# Altium PCB PCB2.PcbDoc
Units mm, origin at the board's own origin, x right, y up, seen from the top; angles counter-clockwise.
Board outline 98.3 x 90.93 mm, 2 copper layers (Top Layer, Bottom Layer); 17 components, 62 nets, 211 pads, 0 vias.
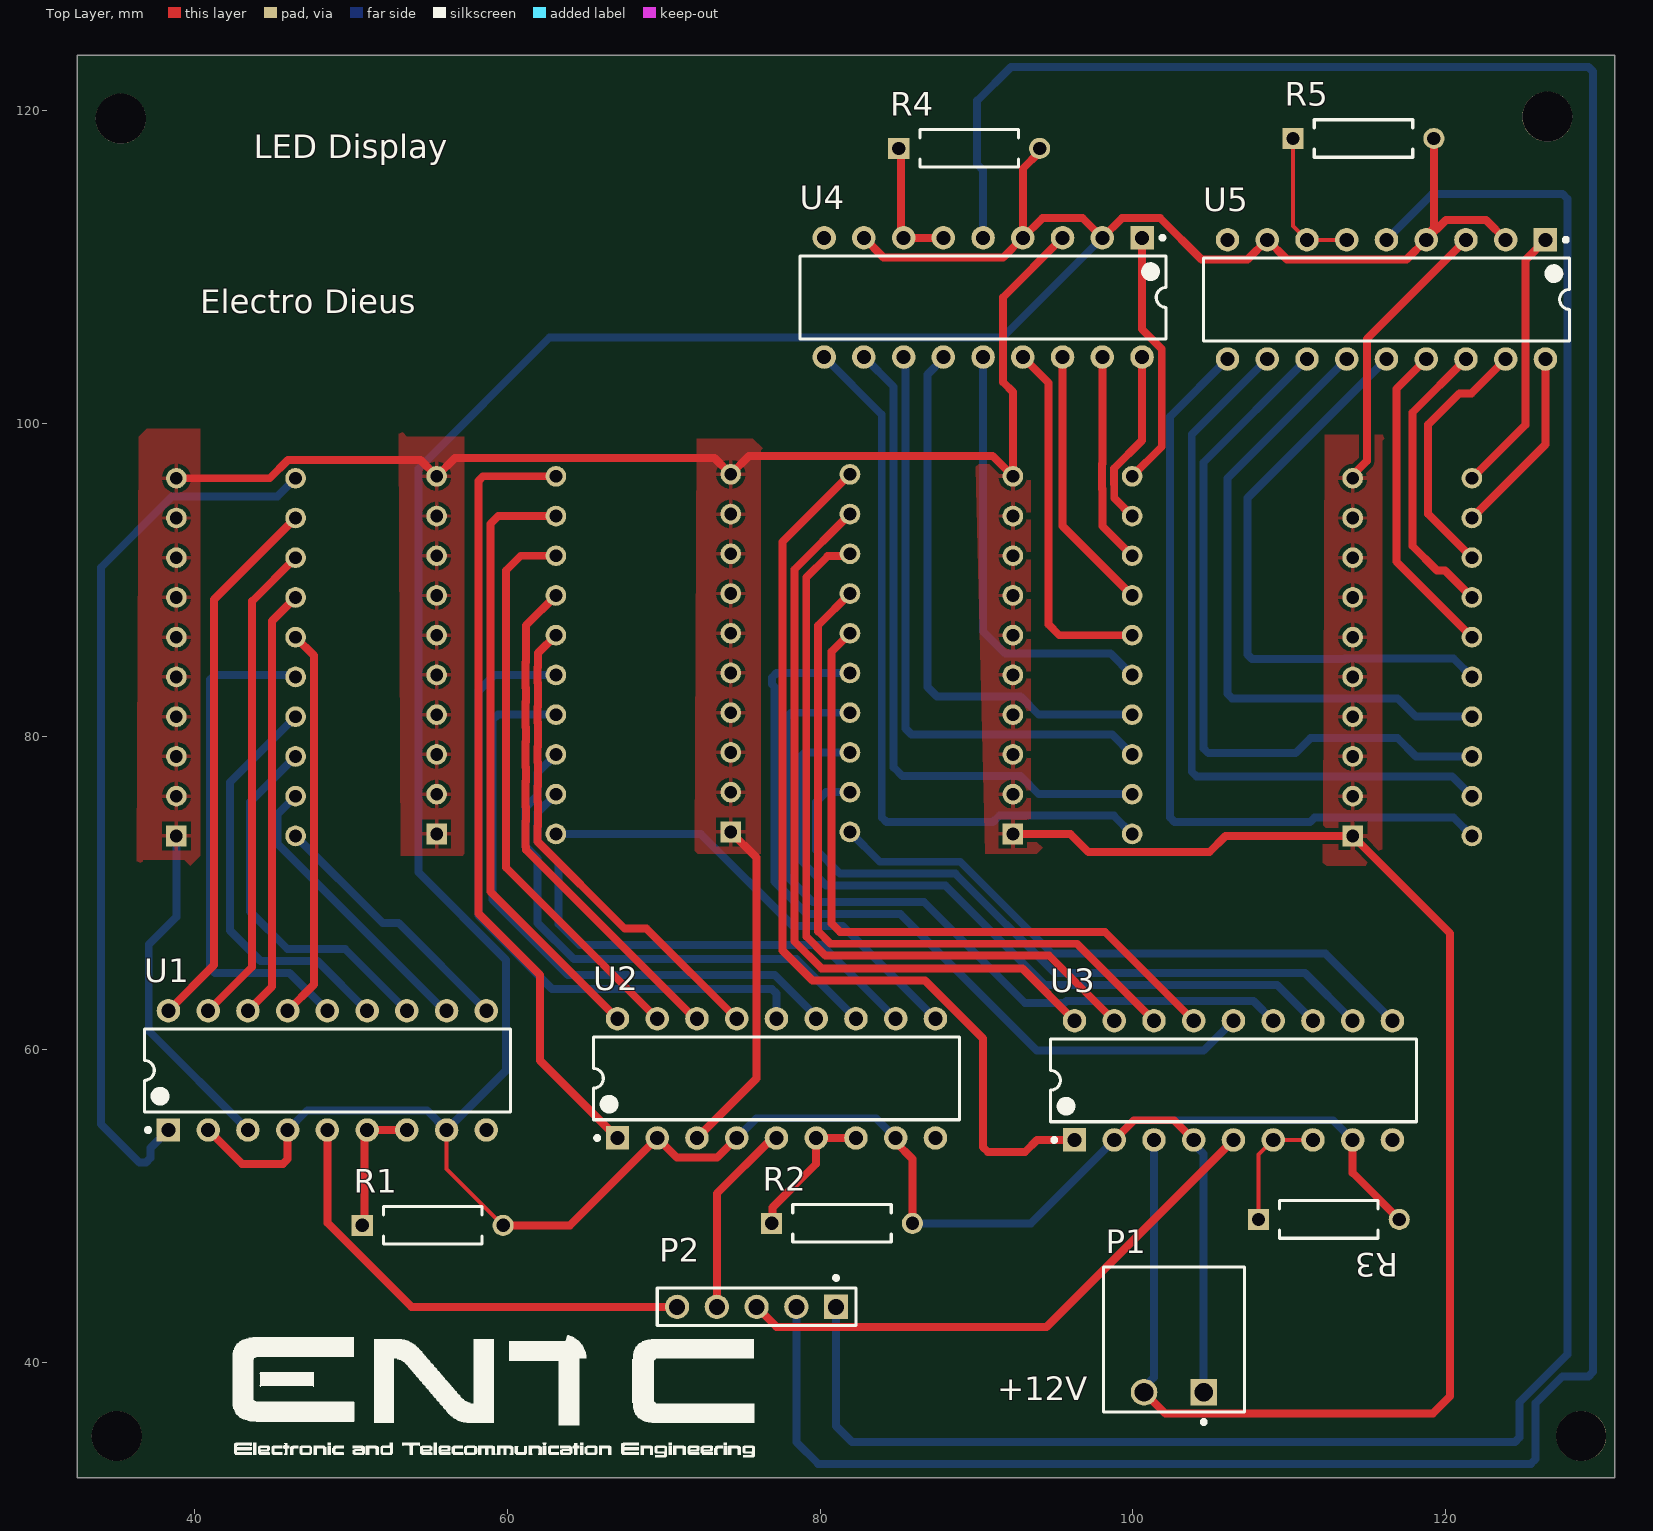
[diagram p0: Top Layer view]
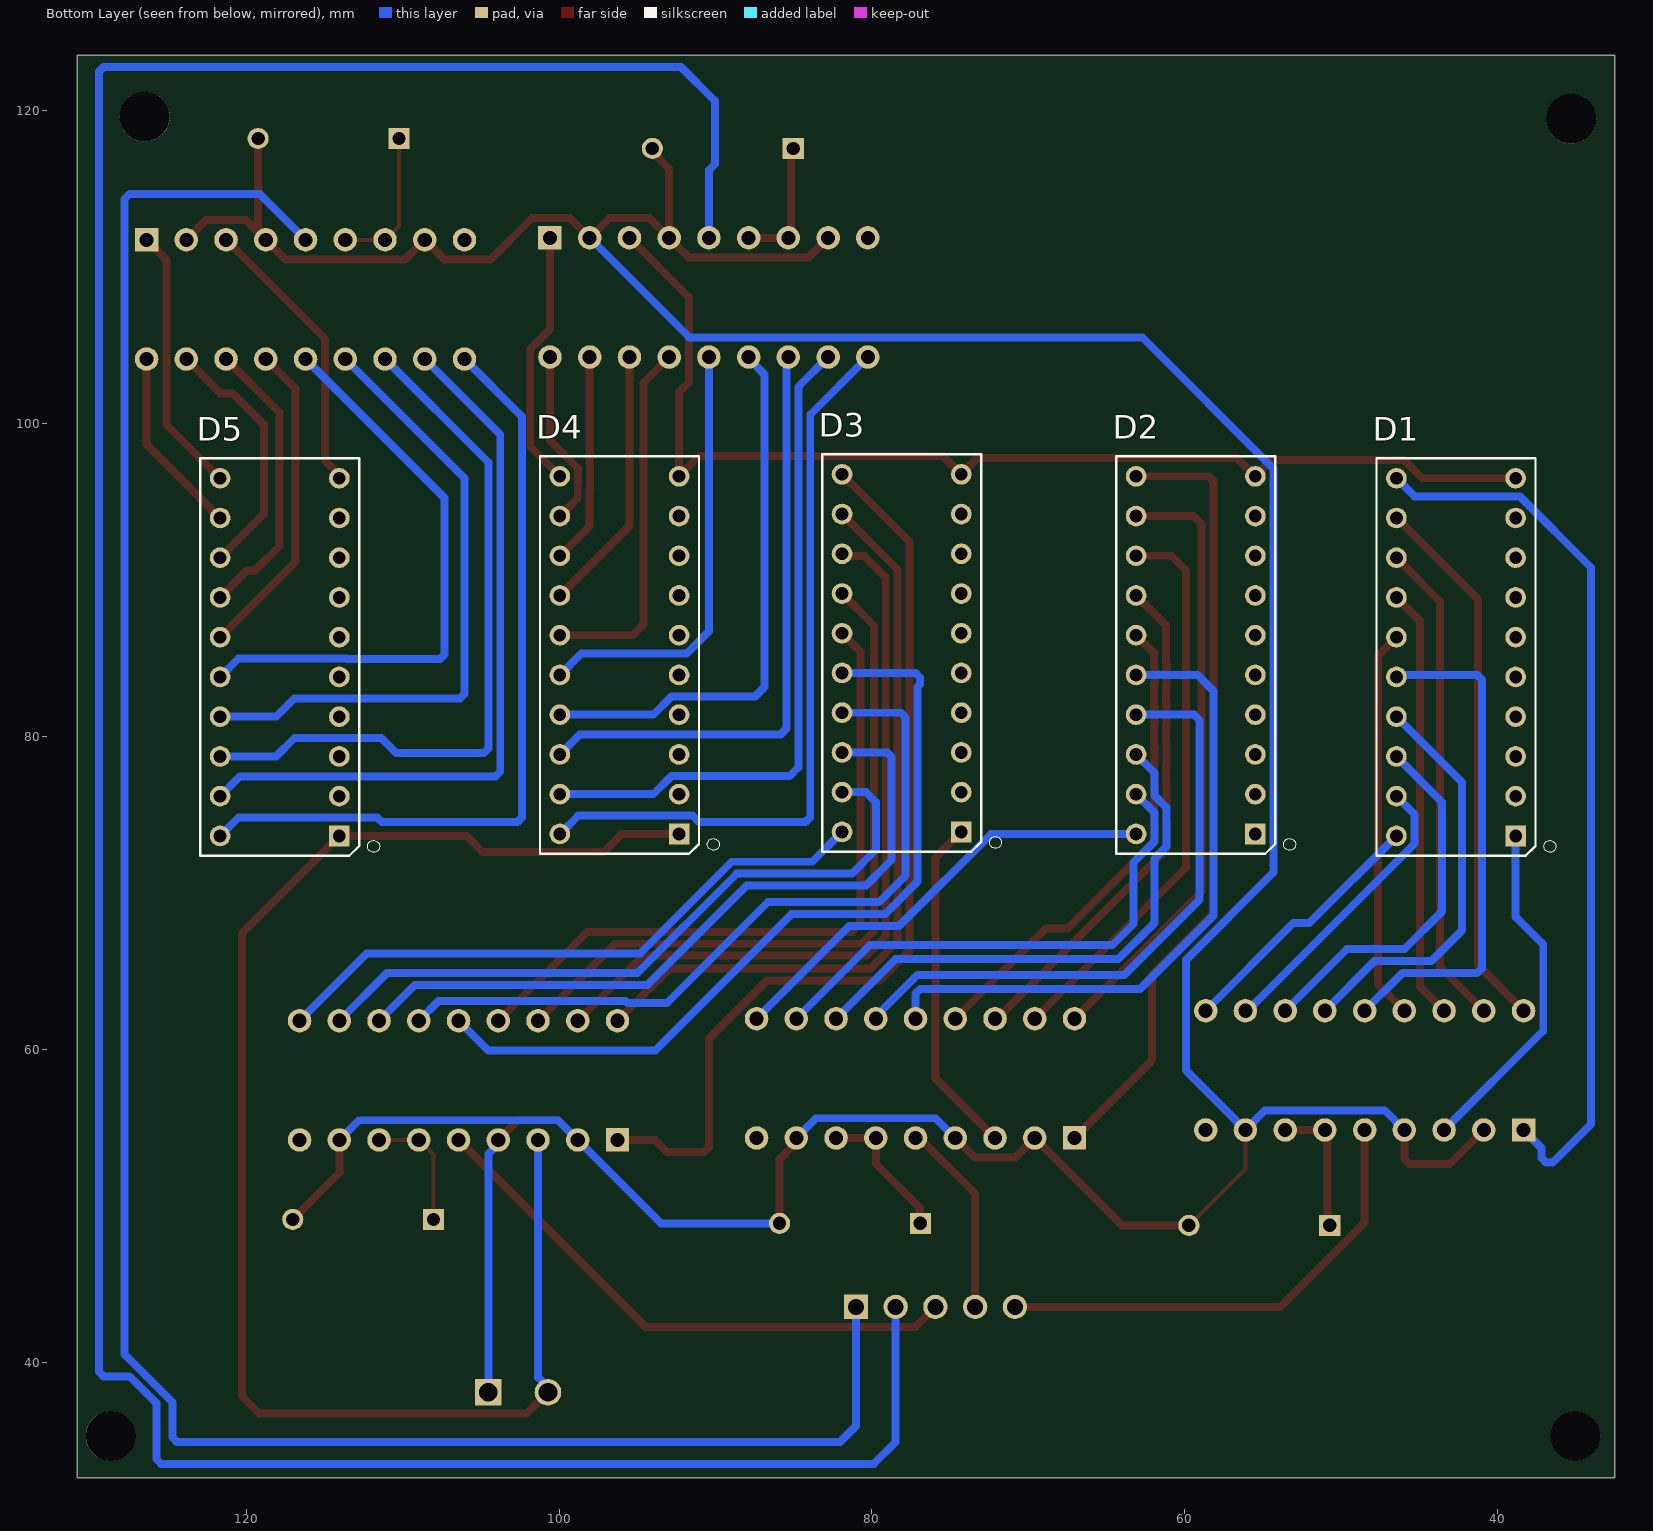
[diagram p1: Bottom Layer view, seen from below]
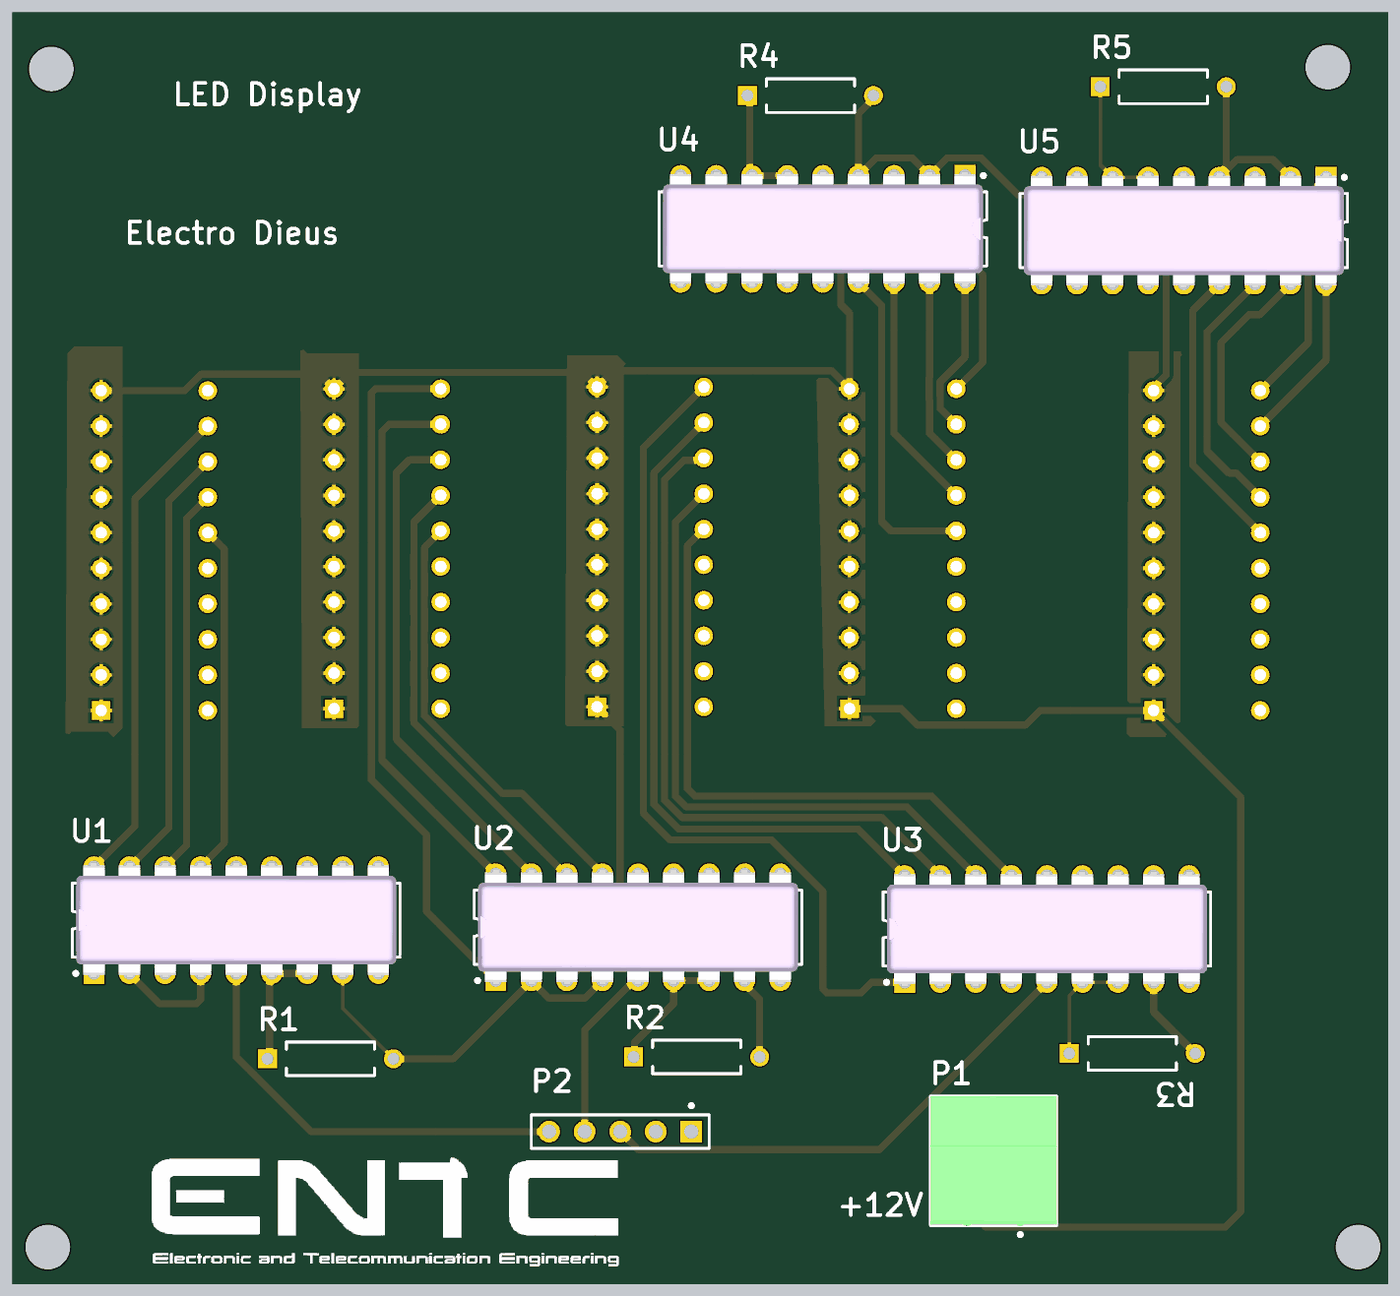
[diagram p2: 3D render of the assembled board from above, using the file's embedded part models]
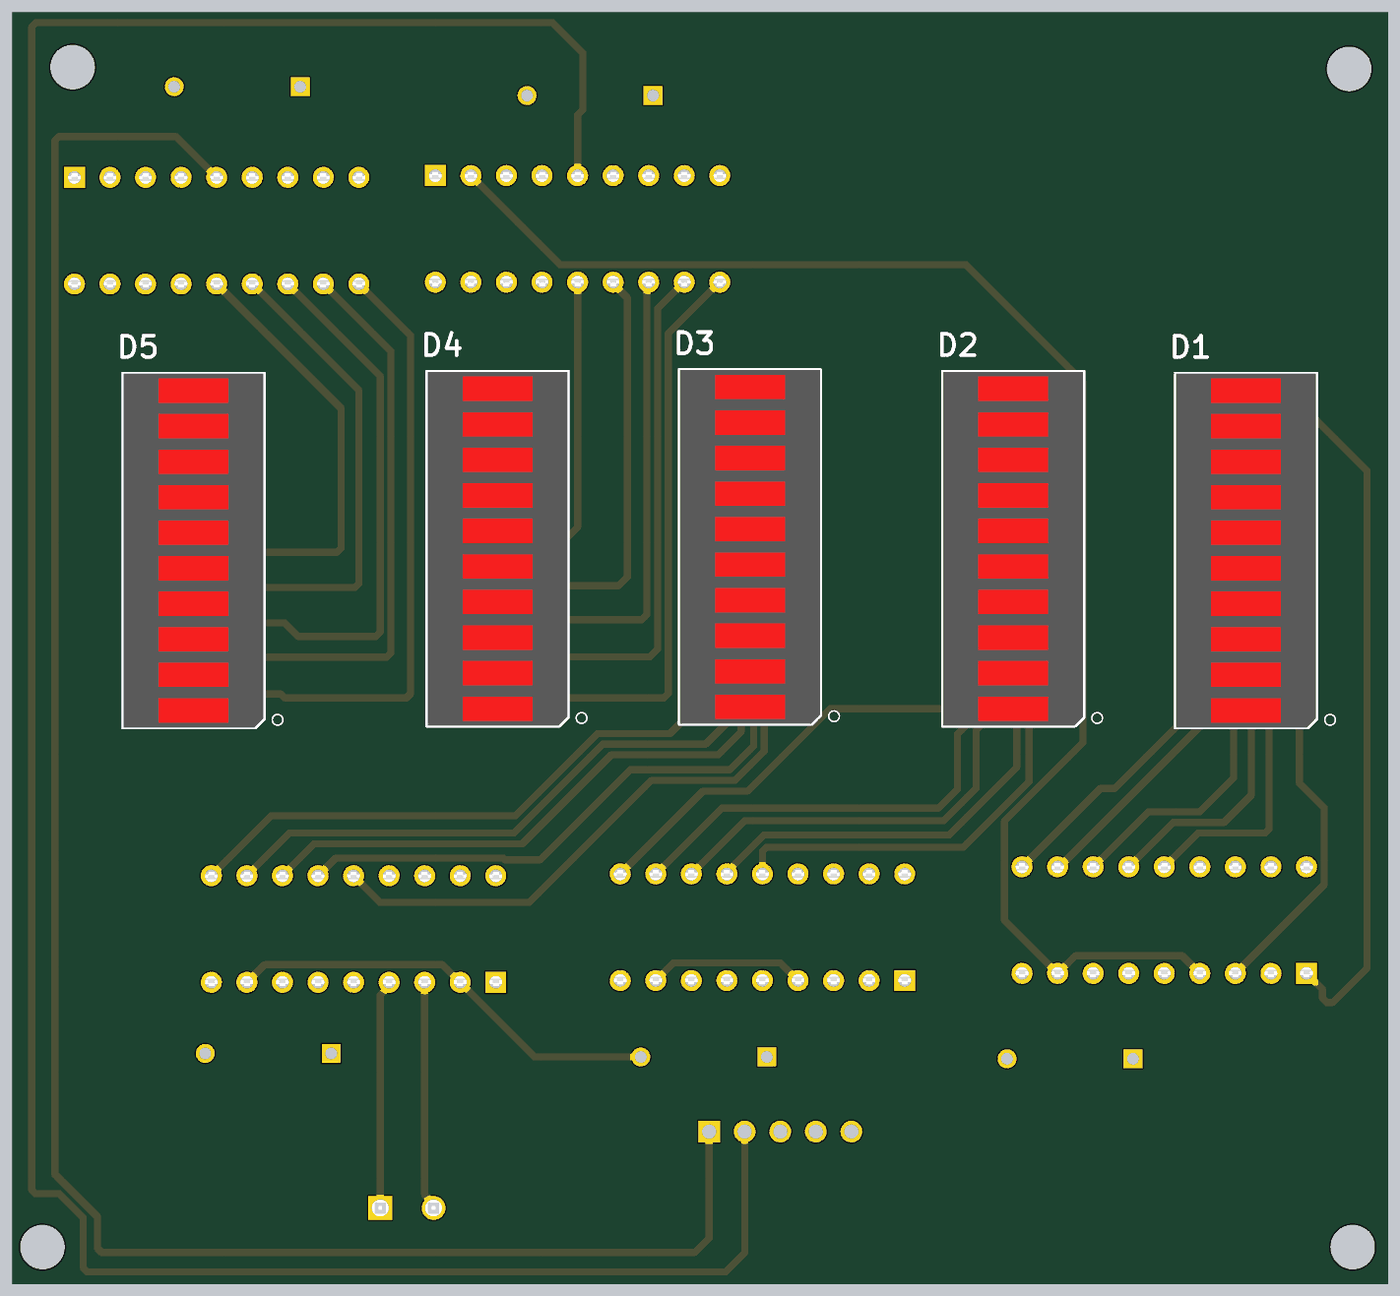
[diagram p3: 3D render of the assembled board from below, using the file's embedded part models]

## Layer stack, top to bottom
Top Solder: solder mask 0.0102, Solder Resist, Dk 3.5
Top Layer: signal copper 0.0356
Dielectric 1: dielectric 0.32, FR-4, Dk 4.8
Bottom Layer: signal copper 0.0356
Bottom Solder: solder mask 0.0102, Solder Resist, Dk 3.5

## Board outline
32.512,32.639 130.81,32.639 130.81,123.571 32.512,123.571

## Design rules (kind name [scope] priority, off if disabled: settings)
Clearance [All] p1: gap=0.254 ignorepadtopadclearanceinfootprint=FALSE
HoleSize [All] p1: absolutevalues=TRUE maxlimit=4 minlimit=0.025 maxpercent=80.000 minpercent=20.000
PolygonConnect [All] p1: connectstyle=Relief reliefconductorwidth=0.254 reliefentries=4 polygonreliefangle="90 Angle" airgapwidth=0.254
RoutingVias [All] p1: holewidth=0.711 width=1.27 viastyle="Through Hole" minholewidth=0.711 minwidth=1.27 maxholewidth=0.711 maxwidth=1.27
SolderMaskExpansion [All] p1: expansion=0.102 istentingtop=FALSE
SupplyNets "Schematic Supply Nets_1" [InNet('GND')] p1: voltage=0.000
SupplyNets "Schematic Supply Nets" [InNet('+12')] p2: voltage=0.000
Width [All] p1: maxlimit=0.508 minlimit=0.254 preferedwidth=0.508 minimp=50.000000 maximp=50.000000 favimp=50.000000
29 further rules are at their usual default settings.

## Classes and differential pairs
component class Sheet2: D1 D2 D3 D4 D5 P1 P2 R1 R3 R4 R5 U1 U3 U4 U5

## Components (designator, comment, footprint, x,y, rotation, side; value= is the part's Value field where it differs from the comment)
D1 "OSX10201-GGR1" DIP760W45P254L2550H790Q20 42.672,85.09 r0 bottom
D2 "OSX10201-GGR1" DIP760W45P254L2550H790Q20 59.309,85.217 r0 bottom
D3 "OSX10201-GGR1" DIP760W45P254L2550H790Q20 78.105,85.344 r0 bottom
D4 "OSX10201-GGR1" DIP760W45P254L2550H790Q20 96.139,85.217 r0 bottom
D5 "OSX10201-GGR1" DIP760W45P254L2550H790Q20 117.856,85.09 r0 bottom
P1 "1803277" PHOE-1803277_V 102.616,38.1 r180 top
P2 "77311-462K05LF" FCI-77311-5_V 75.946,43.561 r180 top
R1 "MFR-25FBF52-1K" RESA60-630X240 55.245,48.768 r0 top value=1k
R2 "MFR-25FBF52-1K" RESA60-630X240 81.407,48.895 r0 top value=1k (schematic designator R3)
R3 "MFR-25FBF52-1K" RESA60-630X240 112.522,49.149 r0 top value=1k (schematic designator R5)
R4 "MFR-25FBF52-1K" RESA60-630X240 89.535,117.602 r0 top value=1k
R5 "MFR-25FBF52-1K" RESA60-630X240 114.736,118.237 r0 top value=1k (schematic designator R2)
U1 "LM3915N-1/NOPB" NFK0018A 48.514,58.674 r90 top
U2 "LM3915N-1/NOPB" NFK0018A 77.216,58.166 r90 top (schematic designator U3)
U3 "LM3915N-1/NOPB" NFK0018A 106.426,58.039 r90 top (schematic designator U5)
U4 "LM3915N-1/NOPB" NFK0018A 90.424,108.077 r270 top
U5 "LM3915N-1/NOPB" NFK0018A 116.205,107.95 r270 top (schematic designator U2)

## Footprints (in the part's own frame and the unit in brackets; to place one, negate y for a bottom-side part, rotate by r counter-clockwise, add the part's x,y. Pads: shape width x height; smd on the part's side, far side on the other; paste and mask are expansions set on the pad)
DIP760W45P254L2550H790Q20 [mil]
  rect 52x52 / inner round 52 / far side rect 52x52 hole 32: 1(-150,450)
  round 52 hole 32: 2(-150,350) 3(-150,250) 4(-150,150) 5(-150,50) 6(-150,-50) 7(-150,-150) 8(-150,-250) 9(-150,-350) 10(-150,-450) 11(150,-450) 12(150,-350) 13(150,-250) 14(150,-150) 15(150,-50) 16(150,50) 17(150,150) 18(150,250) 19(150,350) 20(150,450)
  silkscreen extent -251,-500 200,500, body extent -201,-502 201,502, height 311
FCI-77311-5_V [mm] "THD, 5-Leads, Body 12.7x2.4mm, Pitch 2.54mm"
  rect 1.55x1.55 hole 1.02: 1(-5.08,0)
  round 1.55 hole 1.02: 2(-2.54,0) 3(0,0) 4(2.54,0) 5(5.08,0)
  silkscreen extent -6.35,-1.97 6.35,1.2, body extent -6.35,-1.2 6.35,1.2, height 16.24
NFK0018A [mm] "DIP, 18-Leads, Body 23.35x6.6mm, Pitch 2.54mm"
  rect 1.5x1.5 hole 0.9: 1(-3.81,10.16)
  round 1.5 hole 0.9: 2(-3.81,7.62) 3(-3.81,5.08) 4(-3.81,2.54) 5(-3.81,0) 6(-3.81,-2.54) 7(-3.81,-5.08) 8(-3.81,-7.62) 9(-3.81,-10.16) 10(3.81,-10.16) 11(3.81,-7.62) 12(3.81,-5.08) 13(3.81,-2.54) 14(3.81,0) 15(3.81,2.54) 16(3.81,5.08) 17(3.81,7.62) 18(3.81,10.16)
  silkscreen extent -3.93,-11.7 2.65,11.7, body extent -4.1,-11.43 4.1,11.43, height 4.21
PHOE-1803277_V [mm] "CONN, Body 9.2x9.01mm, Pitch 3.81mm"
  rect 1.7x1.7 hole 1.2: 1(-1.905,0)
  round 1.7 hole 1.2: 2(1.905,0)
  silkscreen extent -4.5,-8 4.5,2.02, body extent -4.51,-8 4.5,1.3, height 7.25
RESA60-630X240 [mm] "Axial Resistor, 2-Leads, Dia 2.4mm, Body Length 6.3mm"
  rect 1.35x1.35 hole 0.85: 1(-4.5,0)
  round 1.35 hole 0.85: 2(4.5,0)
  silkscreen extent -3.15,-1.2 3.15,1.2, body extent -4.77,-1.19 4.77,1.2, height 2.4

## Part data
D1 D2 D3 D4 D5: "Display: LED; bargraph; green (7x) / red (3x); 25.5x10.2x7.9mm", Package=None, Check_prices=https://www.snapeda.com/parts/OSX10201-GGR1/OptoSupply/view-part/?ref=eda, MF=OptoSupply, MP=OSX10201-GGR1, SnapEDA_Link=https://www.snapeda.com/parts/OSX10201-GGR1/OptoSupply/view-part/?ref=snap
P1: library part CMP-002-00014-2, "Male Header, Pitch 3.81 mm, 1 x 2 Position, Height 7.25 mm, Tail Length 3.4 mm, RoHS, Bulk", Colour=Green, Current Rating=8A, Manufacturer="Phoenix Contact", Package Description="Male Header, Pitch 3.81 mm, 1 x 2 Position, Height 7.25 mm, Tail Length 3.4 mm", Package Quantity=50, Voltage Rating=160V, Case/Package=1803277, Connector Type=Header, Contact Plating=Tin, Datasheet URL=https://datasheet.ciiva.com/16096/1803277-16096845.pdf, Datasheet Version=Feb-14, Diameter=7.25mm, Gender=Male, Lead Pitch=0.15inch, Manufacturer URL=http://www.phoenixcontact.com/, Max Current Rating=8A, Mounting Technology=TH, Package Reference=1803277, Packaging=Bulk, Pins=2, RoHS Compliant=True, Rows=1
P2: library part CMP-002-00021-2, "Male Header, Pitch 2.54 mm, 1 x 5 Position, Height 16.24 mm, Tail Length 3.05 mm, -65 to 125 degC, RoHS, Tape and Reel", Case/Package=77311-5, Manufacturer="FCI Electronics", Package Description="Male Header, Pitch 2.54 mm, 1 x 5 Position, Height 16.24 mm, Tail Length 3.05 mm", Connector Type=Header, Datasheet URL=http://portal.fciconnect.com/Comergent//fci/drawing/77311.pdf, Datasheet Version="Rev. CK, 07/2016", Gender=Male, Manufacturer URL=http://portal.fciconnect.com/, Mounting Technology=TH, Package Reference=77311-5, RoHS Compliant=Unknown
R1 R2 R3 R4 R5: library part CMP-009-00048-4, "Axial Resistor, 1 KOhm, +/- 1%, 250 mW, -55 to 155 degC, 2-Pin THD, RoHS, Bulk", Case/Package=Axial, Manufacturer=Yageo, Max Operating Temperature=155°C, Min Operating Temperature=-55°C, Package Description="2-Pin Axial Lead, Dia 2.4 mm, Body Length 6.3 mm", Package Quantity=200, Package Reference=MFR-25, Power=250mW, Tolerance=1%, Voltage Rating=250V, Composition=CarbonFilm, Datasheet URL=http://www.yageo.com/documents/recent/Yageo%20LR_MFR_2013.pdf, Datasheet Version=Apr-13, Manufacturer URL=http://www.yageo.com/, Mounting Technology=TH, Packaging=Bulk, RoHS Compliant=True
U1 U2 U3 U4 U5: library part CMP-0058-00004-3, "Dot/Bar Display Driver, 18-pin MDIP, Pb-Free", Manufacturer="Texas Instruments", PackageTopMarking=NSUZXYYTTE#*LM3915N-1, PowerWise=N, Code_JEDEC=MS-001-AC, ComponentLink1Description="Datasheet URL", ComponentLink1URL=http://www.ti.com/general/docs/lit/getliterature.tsp?genericPartNumber=LM3915&fileType=pdf, CompType="Audio IC", PackageDescription="MDIP, .900 x .250 x .155in, 18 Lead, .100in Pitch", PackageReference=NFK0018A, PinCount=18, RoHS=Y

## Free pads (board coordinates)
  round 3.2 hole 3.2 unplated: 17(35.052,35.306) 18(128.651,35.306) 19(35.306,119.507) 20(126.492,119.634)

## Nets (pads, with @x,y where several pads share a name; then routed paths per layer and width w, separated by ;. In a path a pad name is that pad's centre, name@x,y a point inside that pad or via, vN(x,y) a via of type N, cw(c..) or ccw(c..) an arc to the next point about the centre after c; other vN are vias at no path point)
+12: D1.1 D1.2 D1.3 D1.4 D1.5 D1.6 D1.7 D1.8 D1.9 D1.10 D2.1 D2.2 D2.3 D2.4 D2.5 D2.6 D2.7 D2.8 D2.9 D2.10 D3.1 D3.2 D3.3 D3.4 D3.5 D3.6 D3.7 D3.8 D3.9 D3.10 D4.1 D4.2 D4.3 D4.4 D4.5 D4.6 D4.7 D4.8 D4.9 D4.10 D5.1 D5.2 D5.3 D5.4 D5.5 D5.6 D5.7 D5.8 D5.9 D5.10 P1.2 U1.3 U2.3 U3.3 U4.3 U5.3 | length 233.6
  Top Layer w0.508: D1.10 44.83,96.52 45.998,97.688 54.458,97.688 D2.10 56.667,97.815 73.254,97.815 D3.10 75.463,97.942 91.034,97.942 D4.10 92.329,102.032 91.706,102.655 91.706,108.089 U4.3 ; U2.3 75.934,58.154 75.934,72.275 D3.1 ; D4.1 96,73.787 97.168,72.619 104.883,72.619 105.925,73.66 D5.1 120.269,67.437 120.269,37.846 119.165,36.742 102.069,36.742 P1.2 ; D5.10 114.046,96.73 114.947,97.631 114.947,105.422 U5.3
  Bottom Layer w0.508: D1.1 38.862,68.491 37.096,66.725 37.096,61.202 U1.3 ; P1.2 100.711,38.423 101.346,39.058 U3.3
GND: P1.1 R1.2 R2.2 R3.2 R4.2 R5.2 U1.2 U1.4 U1.8 U2.2 U2.4 U2.8 U3.2 U3.4 U3.8 U4.2 U4.4 U4.8 U5.2 U5.4 U5.8 | length 278.5
  Top Layer w0.254: U1.8 56.134,52.379 R1.2
  Top Layer w0.508: U1.2 43.053,52.705 45.676,52.705 45.974,53.003 U1.4 ; R1.2 64.008,48.768 U2.2 70.854,53.098 73.418,53.098 U2.4 ; U4.8 84.062,110.629 91.706,110.629 U4.4 ; U2.8 84.836,54.088 85.907,53.017 R2.2 ; R4.2 94.035,117.374 92.964,116.303 U4.4 ; U3.2 100.064,55.487 102.628,55.487 U3.4 ; U3.8 114.046,52.125 R3.2 ; R5.2 119.236,112.519 118.745,112.028 U5.4 ; U5.2 122.567,113.018 120.003,113.018 U5.4 ; U4.4 94.222,113.145 96.786,113.145 U4.2 99.302,113.145 101.747,113.145 104.39,110.502 107.327,110.502 U5.8 109.843,110.502 117.487,110.502 U5.4
  Bottom Layer w0.508: U1.4 47.232,56.122 54.876,56.122 U1.8 59.932,58.662 59.932,65.736 54.331,71.338 54.331,97.131 62.725,105.525 91.682,105.525 U4.2 ; U2.4 75.934,55.614 83.578,55.614 U2.8 ; R2.2 93.472,48.895 U3.2 100.064,55.487 112.788,55.487 U3.8 ; U3.4 103.886,53.961 104.521,53.326 P1.1
NetD1_11: D1.11 U1.1 | length 56.9
  Bottom Layer w0.508: U1.1 37.211,53.721 37.211,53.086 36.913,52.788 36.493,52.788 34.036,55.245 34.036,90.806 38.581,95.352 45.314,95.352 D1.11
NetD1_12: D1.12 U1.18 | length 34.9
  Top Layer w0.508: U1.18 41.275,65.405 41.275,88.773 D1.12
NetD1_13: D1.13 U1.17 | length 31.3
  Top Layer w0.508: U1.17 43.705,65.295 43.705,88.663 D1.13
NetD1_14: D1.14 U1.16 | length 27.7
  Top Layer w0.508: U1.16 44.975,64.025 44.975,87.393 D1.14
NetD1_15: D1.15 U1.15 | length 25.1
  Top Layer w0.508: U1.15 47.65,64.16 47.65,85.192 D1.15
NetD1_16: D1.16 U1.14 | length 32.7
  Bottom Layer w0.508: D1.16 46.355,83.947 41.319,83.947 41.021,83.649 41.021,65.195 41.319,64.897 46.101,64.897 U1.14
NetD1_17: D1.17 U1.13 | length 26.3
  Bottom Layer w0.508: D1.17 42.291,77.089 42.291,67.608 44.24,65.659 47.879,65.659 U1.13
NetD1_18: D1.18 U1.12 | length 23.8
  Bottom Layer w0.508: D1.18 43.561,75.819 43.561,68.834 45.974,66.421 49.657,66.421 U1.12
NetD1_19: D1.19 U1.11 | length 18.8
  Bottom Layer w0.508: D1.19 45.314,75.032 45.314,73.176 56.006,62.484 U1.11
NetD1_20: D1.20 U1.10 | length 16.9
  Bottom Layer w0.254: D1.20 D1.20@46.507,73.635
  Bottom Layer w0.508: D1.20 52.053,68.089 53.069,68.089 U1.10
NetD2_11: D2.11 U2.1 | length 50.8
  Top Layer w0.508: D2.11 58.464,96.647 58.166,96.349 58.166,68.707 62.109,64.764 62.109,59.303 U2.1
NetD2_12: D2.12 U2.18 | length 39.4
  Top Layer w0.508: D2.12 59.436,94.107 58.928,93.599 58.928,70.104 U2.18
NetD2_13: D2.13 U2.17 | length 36.2
  Top Layer w0.508: D2.13 60.877,91.567 59.944,90.634 59.944,71.628 U2.17
NetD2_14: D2.14 U2.16 | length 32.5
  Top Layer w0.508: D2.14 61.214,87.122 61.214,84.772 61.189,84.747 61.189,83.147 61.214,83.122 61.214,82.232 61.189,82.207 61.189,80.607 61.214,80.582 61.214,79.692 61.189,79.667 61.189,78.067 61.214,78.042 61.214,77.152 61.189,77.127 61.189,75.527 61.214,75.502 61.214,74.612 61.189,74.587 61.189,72.987 61.214,72.962 61.214,72.771 72.009,61.976 U2.16
NetD2_15: D2.15 U2.15 | length 31.2
  Top Layer w0.508: D2.15 61.976,85.344 61.976,84.456 61.951,84.431 61.951,83.463 61.976,83.438 61.976,81.916 61.951,81.891 61.951,80.923 61.976,80.898 61.976,79.376 61.951,79.351 61.951,78.383 61.976,78.358 61.976,76.836 61.951,76.811 61.951,75.843 61.976,75.818 61.976,74.296 61.951,74.271 61.951,73.303 67.519,67.734 68.918,67.734 U2.15
NetD2_16: D2.16 U2.14 | length 42.5
  Bottom Layer w0.508: D2.16 59.182,83.947 58.166,82.931 58.166,68.58 62.865,63.881 76.918,63.881 77.216,63.583 U2.14
NetD2_17: D2.17 U2.13 | length 39.6
  Bottom Layer w0.508: D2.17 59.416,81.407 59.055,81.046 59.055,69.596 63.881,64.77 77.107,64.77 79.756,62.121 U2.13
NetD2_18: D2.18 U2.12 | length 34.8
  Bottom Layer w0.508: D2.18 61.951,77.699 61.951,76.236 61.189,75.474 61.189,72.987 61.951,72.225 61.951,68.097 64.262,65.786 78.486,65.786 U2.12
NetD2_19: D2.19 U2.11 | length 33.4
  Bottom Layer w0.508: D2.19 61.951,75.159 61.951,73.303 63.297,71.957 63.297,68.021 64.643,66.675 80.137,66.675 U2.11
NetD2_20: D2.20 U2.10 | length 29.1
  Bottom Layer w0.508: D2.20 72.383,73.787 78.271,67.899 81.453,67.899 U2.10
NetD3_11: D3.11 U3.1 | length 60.6
  Top Layer w0.508: D3.11 77.597,92.456 77.597,66.338 79.517,64.417 86.714,64.417 90.424,60.707 90.424,53.765 90.722,53.467 93.113,53.467 93.875,54.229 U3.1
NetD3_12: D3.12 U3.18 | length 48.8
  Top Layer w0.508: D3.12 78.359,90.678 78.359,66.929 80.109,65.179 92.936,65.179 U3.18
NetD3_13: D3.13 U3.17 | length 48.3
  Top Layer w0.508: D3.13 81.763,91.542 80.493,91.542 79.121,90.17 79.121,67.245 80.358,66.007 94.648,66.007 U3.17
NetD3_14: D3.14 U3.16 | length 46.3
  Top Layer w0.508: D3.14 79.883,87.122 79.883,67.56 80.674,66.769 96.426,66.769 U3.16
NetD3_15: D3.15 U3.15 | length 44.7
  Top Layer w0.508: D3.15 80.747,85.446 80.747,68.065 81.28,67.531 98.204,67.531 U3.15
NetD3_16: D3.16 U3.14 | length 52.8
  Bottom Layer w0.508: D3.16 77.216,84.074 76.918,83.776 76.918,83.356 77.089,83.185 77.089,70.739 79.167,68.661 85.136,68.661 93.853,59.944 104.521,59.944 U3.14
NetD3_17: D3.17 U3.13 | length 49.4
  Bottom Layer w0.508: D3.17 78.149,81.534 77.851,81.236 77.851,71.12 79.548,69.423 86.66,69.423 93.091,62.992 95.63,62.992 95.745,63.107 107.708,63.107 U3.13
NetD3_18: D3.18 U3.12 | length 46.9
  Bottom Layer w0.508: D3.18 79.038,78.994 78.74,78.696 78.74,72.136 80.391,70.485 88.011,70.485 94.361,64.135 109.22,64.135 U3.12
NetD3_19: D3.19 U3.11 | length 44.3
  Bottom Layer w0.508: D3.19 80.391,76.454 79.756,75.819 79.756,72.771 81.28,71.247 88.646,71.247 94.996,64.897 110.998,64.897 U3.11
NetD3_20: D3.20 U3.10 | length 39.7
  Bottom Layer w0.508: D3.20 83.82,72.009 88.962,72.009 94.836,66.134 112.301,66.134 U3.10
NetD4_11: D4.11 U4.1 | length 16.5
  Top Layer w0.508: D4.11 101.842,98.54 101.842,104.788 100.584,106.046 U4.1
NetD4_12: D4.12 U4.18 | length 11.4
  Top Layer w0.508: D4.12 98.806,95.25 98.806,96.138 98.781,96.163 98.781,97.131 100.584,98.934 U4.18
NetD4_13: D4.13 U4.17 | length 13.5
  Top Layer w0.508: U4.17 98.044,97.472 98.019,97.447 98.019,95.847 98.044,95.822 98.044,93.472 D4.13
NetD4_14: D4.14 U4.16 | length 17.1
  Top Layer w0.508: U4.16 95.504,93.472 D4.14
NetD4_15: D4.15 U4.15 | length 23.4
  Top Layer w0.508: U4.15 94.615,102.616 94.615,87.166 95.294,86.487 D4.15
NetD4_16: D4.16 U4.14 | length 28.2
  Bottom Layer w0.508: U4.14 90.424,86.74 91.845,85.319 98.577,85.319 D4.16
NetD4_17: D4.17 U4.13 | length 35.3
  Bottom Layer w0.508: U4.13 87.884,104.161 86.868,103.145 86.868,83.185 87.478,82.575 92.813,82.575 93.981,81.407 D4.17
NetD4_18: D4.18 U4.12 | length 39
  Bottom Layer w0.508: U4.12 85.471,104.14 85.471,80.518 85.852,80.137 98.679,80.137 D4.18
NetD4_19: D4.19 U4.11 | length 43
  Bottom Layer w0.508: U4.11 84.709,102.362 84.709,78.047 85.261,77.495 92.813,77.495 93.981,76.327 D4.19
NetD4_20: D4.20 U4.10 | length 47.7
  Bottom Layer w0.508: U4.10 83.947,100.584 83.947,74.847 84.245,74.549 91.052,74.549 91.458,74.955 98.781,74.955 D4.20
NetD5_11: D5.11 U5.1 | length 17.2
  Top Layer w0.508: D5.11 125.083,99.937 125.083,110.478 U5.1
NetD5_12: D5.12 U5.18 | length 12.1
  Top Layer w0.508: D5.12 126.365,98.679 U5.18
NetD5_13: D5.13 U5.17 | length 16.4
  Top Layer w0.508: D5.13 118.872,94.234 118.872,99.949 120.873,101.95 121.635,101.95 U5.17
NetD5_14: D5.14 U5.16 | length 18.5
  Top Layer w0.508: U5.16 117.856,100.711 117.856,92.202 119.429,90.629 119.937,90.629 D5.14
NetD5_15: D5.15 U5.15 | length 20.6
  Top Layer w0.508: U5.15 116.84,102.235 116.84,91.186 D5.15
NetD5_16: D5.16 U5.14 | length 37.5
  Bottom Layer w0.508: U5.14 107.315,95.25 107.315,85.261 107.613,84.963 113.537,84.963 113.562,84.988 120.498,84.988 D5.16
NetD5_17: D5.17 U5.13 | length 40.8
  Bottom Layer w0.508: U5.13 106.045,96.52 106.045,82.746 106.343,82.448 116.92,82.448 118.088,81.28 D5.17
NetD5_18: D5.18 U5.12 | length 45.8
  Bottom Layer w0.508: U5.12 104.521,97.536 104.521,79.248 104.819,78.95 110.39,78.95 111.348,79.908 116.92,79.908 118.088,78.74 D5.18
NetD5_19: D5.19 U5.11 | length 46.9
  Bottom Layer w0.508: U5.11 103.759,99.314 103.759,77.768 104.057,77.47 120.396,77.47 D5.19
NetD5_20: D5.20 U5.10 | length 50.8
  Bottom Layer w0.508: U5.10 102.362,100.457 102.362,74.847 102.66,74.549 111.329,74.549 111.608,74.828 120.498,74.828 D5.20
NetP2_1: P2.1 U5.5 | length 145.2
  Bottom Layer w0.508: P2.1 81.026,35.941 82.042,34.925 124.416,34.925 124.714,35.223 124.714,37.465 127.762,40.513 127.762,114.383 127.464,114.681 119.126,114.681 U5.5
NetP2_2: P2.2 U4.5 | length 197.1
  Bottom Layer w0.508: P2.2 78.486,34.925 79.883,33.528 125.432,33.528 125.73,33.826 125.73,37.403 127.443,39.116 129.115,39.116 129.413,39.414 129.413,122.511 129.115,122.809 92.202,122.809 90.043,120.65 90.043,116.593 90.424,116.212 U4.5
NetP2_3: P2.3 U3.5 | length 36
  Top Layer w0.508: P2.3 77.229,42.278 94.475,42.278 U3.5
NetP2_4: P2.4 U2.5 | length 12.5
  Top Layer w0.508: P2.4 73.406,50.8 76.962,54.356 U2.5
NetP2_5: P2.5 U1.5 | length 30.5
  Top Layer w0.508: U1.5 48.514,48.931 53.884,43.561 P2.5
NetR1_1: R1.1 U1.6 U1.7 | length 8.8
  Top Layer w0.508: R1.1 50.899,48.923 50.899,54.709 U1.6 U1.7
NetR2_1: R5.1 U5.6 U5.7 | length 9.4
  Top Layer w0.254: R5.1 110.236,112.649 U5.7 U5.6
NetR3_1: R2.1 U2.6 U2.7 | length 9.2
  Top Layer w0.508: R2.1 76.962,48.95 76.962,49.911 79.756,52.705 U2.6 U2.7
NetR4_1: R4.1 U4.6 U4.7 | length 8.4
  Top Layer w0.508: R4.1 85.189,117.447 85.189,112.042 U4.7 U4.6
NetR5_1: R3.1 U3.6 U3.7 | length 8
  Top Layer w0.254: R3.1 108.022,53.285 U3.6 U3.7
pads on no net: U1.9 U2.9 U3.9 U4.9 U5.9

## Polygon pours and split planes (outlines as drawn)
+12 on Top Layer "+12_L01_P004" (solid, pour order 4): 112.268,99.314 116.332,99.314 115.951,98.933 115.951,71.755 112.268,71.755 112.141,71.628
+12 on Top Layer "+12_L01_P003" (solid, pour order 3): 89.916,99.06 90.043,98.933 93.472,98.933 93.472,73.66 94.234,72.898 93.853,72.517 90.551,72.517
+12 on Top Layer "+12_L01_P002" (solid, pour order 2): 72.136,99.06 75.692,99.06 76.327,98.425 76.2,98.298 76.2,72.517 72.009,72.517
+12 on Top Layer "+12_L01_P001" (solid, pour order 1): 53.086,99.695 53.594,99.187 57.277,99.187 57.277,72.517 57.15,72.39 53.213,72.39
+12 on Top Layer "+12_L01_P000" (solid, pour order 0): 36.449,99.187 36.957,99.695 40.386,99.695 40.386,72.39 39.751,71.755 39.37,72.136 36.703,72.136 36.703,72.009 36.322,71.628

## Silkscreen, mask and mechanical layers (free items; w line width, h text height)
Top Overlay:
  drawing of 51 lines, arcs and shapes, not listed
  text "LED Display" at 43.815,116.967 h1.52
  text "Electro Dieus" at 40.386,107.061 h1.52
  text "+12V" at 91.313,37.592 h1.52